# Altium PCB LCR.PcbDoc (part 2 of 2)
Units mil, origin at the board's own origin, x right, y up, seen from the top; angles counter-clockwise.
Board outline 3937.01 x 3149.61 mil, 2 copper layers (Top, Bottom); 95 components, 118 nets, 438 pads, 285 vias.
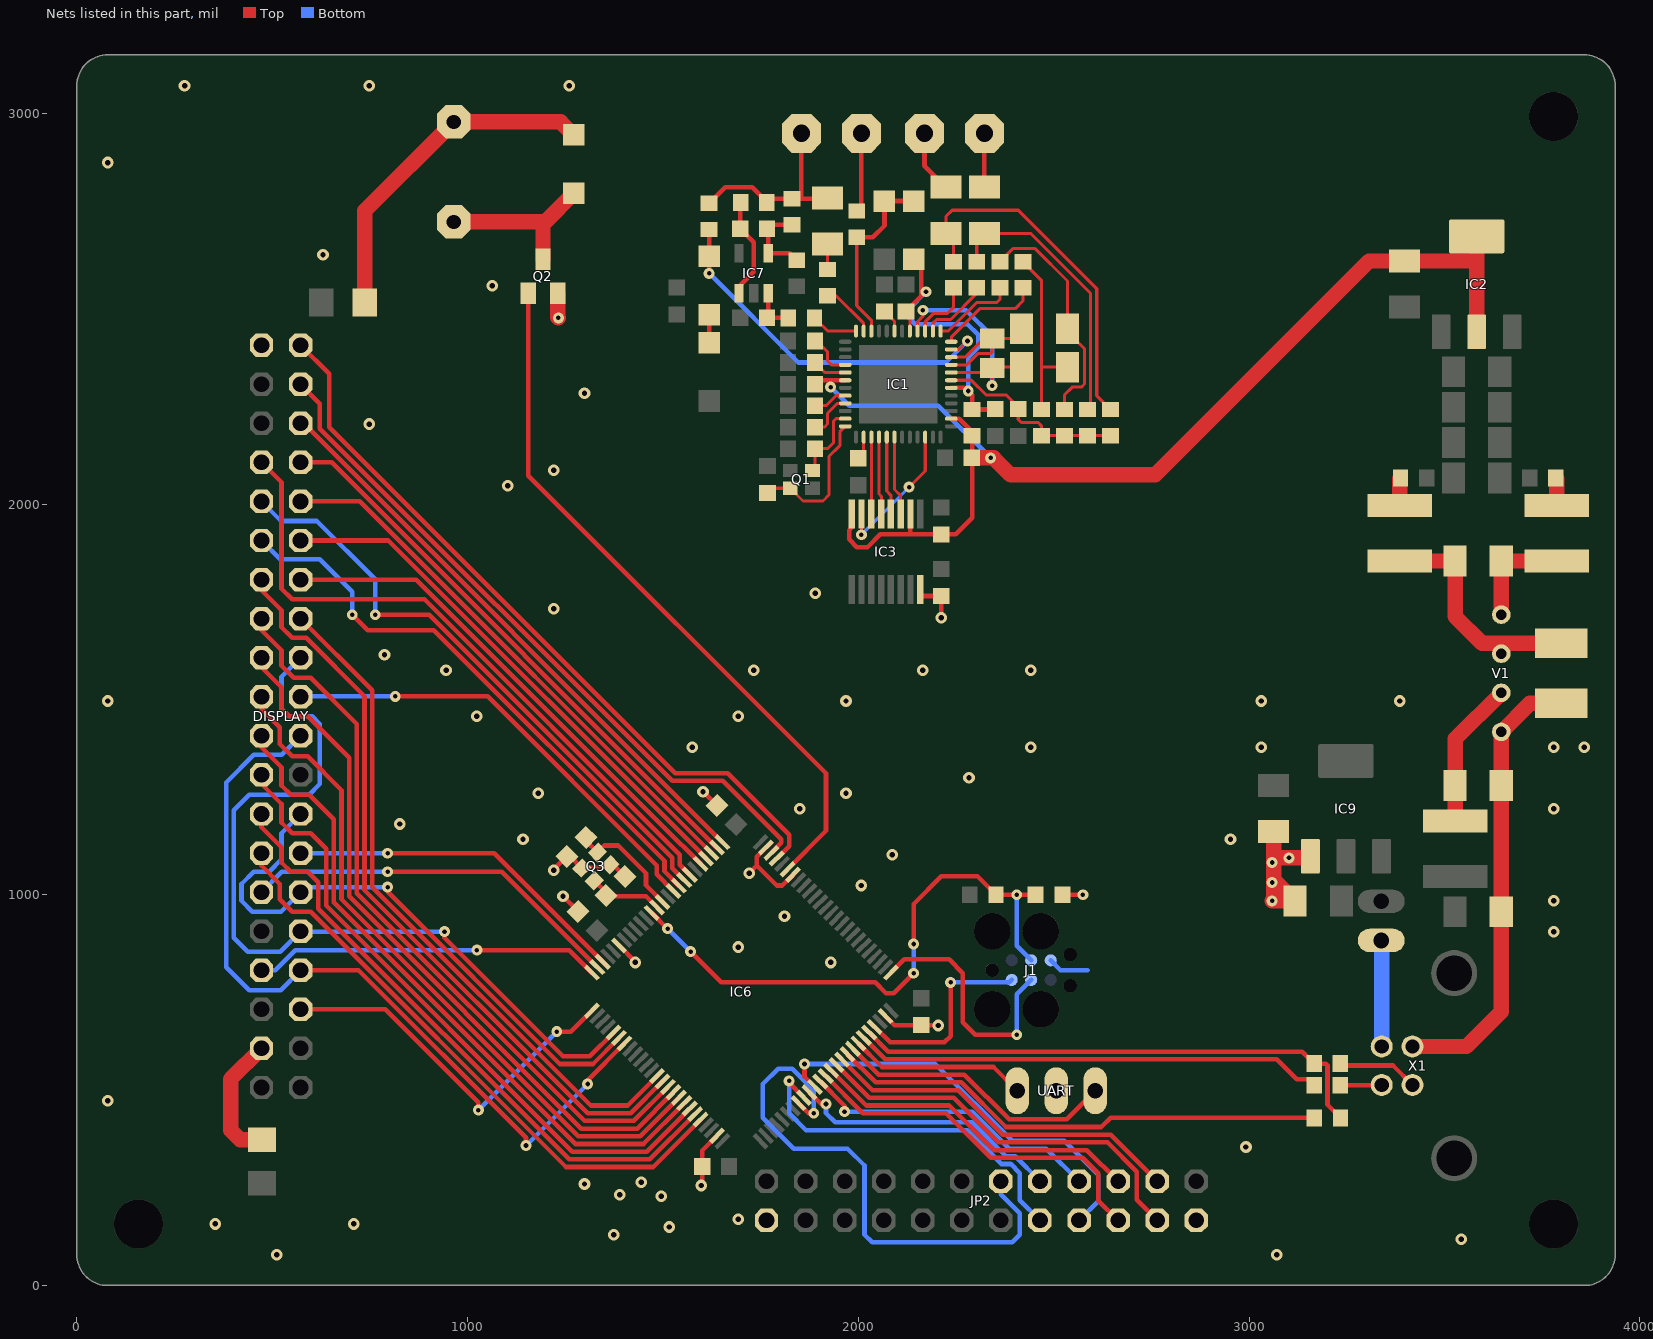
[diagram p2: the nets of this part, all layers, seen from the top]

## Via types
v1: diameter 27.81/27.81 (per signal layer), hole 11.81, Top to Bottom, 220 vias
v2: diameter 29.78/29.78 (per signal layer), hole 13.78, Top to Bottom, 65 vias

## Nets (pads, with @x,y where several pads share a name; then routed paths per layer and width w, separated by ;. In a path a pad name is that pad's centre, name@x,y a point inside that pad or via, vN(x,y) a via of type N, cw(c..) or ccw(c..) an arc to the next point about the centre after c; other vN are vias at no path point) (continued)
EXT_14: IC6.58 JP2.14 | length 1422.4
  Top w11.81: IC6.58@1846.94,466.62 1872.62,440.94 v1(1885.83,440.94)
  Bottom w11.81: v1(1885.83,440.94) 1885.83,500 1830.71,555.12 1795.28,555.12 1755.91,515.75 1755.91,429.13 1834.65,350.39 1972.44,350.39 2015.75,307.09 2015.75,129.92 2035.43,110.24 2393.7,110.24 2413.39,129.92 2413.39,185.04 2364.96,233.46 JP2.14@2364.96,266.54
EXT_15: IC6.59 JP2.15 | length 937.9
  Top w11.81: v1(1822.83,523.62) 1822.83,518.57 IC6.59@1860.86,480.54
  Bottom w11.81: v1(1822.83,523.62) 1822.83,440.94 1866.14,397.64 2279.53,397.64 2366.14,311.02 2389.76,311.02 2413.39,287.4 2413.39,218.11 JP2.15@2464.96,166.54
EXT_16: IC6.60 JP2.16 | length 698.9
  Top w11.81: IC6.60@1874.78,494.46 1904.67,464.57 v1(1917.32,464.57)
  Bottom w11.81: v1(1917.32,464.57) 1917.32,440.94 1940.94,417.32 2291.34,417.32 2377.95,330.71 2401.57,330.71 2464.96,267.32 JP2.16@2464.96,266.54
EXT_17: IC6.61 JP2.17 | length 1076.2
  Top w11.81: v1(1862.2,566.93) 1862.2,534.87 IC6.61@1888.7,508.38
  Bottom w11.81: v1(1862.2,566.93) 2196.85,566.93 2393.7,370.08 2527.56,370.08 2614.17,283.46 2614.17,215.75 JP2.17@2564.96,166.54
EXT_18: IC6.62 JP2.18 | length 777.3
  Top w11.81: IC6.62@1902.62,522.29 1964.57,460.35 v1(1964.57,444.88)
  Bottom w11.81: v1(1964.57,444.88) 2291.34,444.88 2385.83,350.39 2481.1,350.39 JP2.18@2564.96,266.54
EXT_19: IC6.63 JP2.19 | length 942.6
  Top w11.81: IC6.63@1916.54,536.22 2011.81,440.94 2224.41,440.94 2338.58,326.77 2574.8,326.77 2614.17,287.4 2614.17,217.32 JP2.19@2664.96,166.54
EXT_20: IC6.64 JP2.20 | length 852
  Top w11.81: IC6.64@1930.47,550.14 2019.96,460.63 2232.28,460.63 2346.46,346.46 2585.04,346.46 JP2.20@2664.96,266.54
EXT_21: IC6.65 JP2.21 | length 1027.7
  Top w11.81: IC6.65@1944.38,564.06 2028.12,480.32 2244.09,480.32 2358.27,366.14 2637.8,366.14 2712.6,291.34 2712.6,218.9 JP2.21@2764.96,166.54
EXT_22: IC6.66 JP2.22 | length 935.7
  Top w11.81: IC6.66@1958.3,577.98 2036.27,500 2255.91,500 2370.08,385.83 2645.67,385.83 JP2.22@2764.96,266.54
GND: C2.2 C3.2 C4.2 C14.2 C15.2 C21.1 C22.1 C23.1 C24.1 C25.2 C28.2 C32.2 C33.2 DISPLAY.1 IC3.8 IC6.20 IC6.49 IC6.74 IC6.94 IC6.99 IC9.1 J1.5 JP2.1 JP2.23 Q2.2 Q3.2 Q3.4 UART.2 V1.1 X1.4 | length 2815.2
  Top w7.87: Q3.2@1292.21,1068.33 1294.76,1070.87 1358.79,1070.87 Q3.4@1364.59,1076.67
  Top w11.81: v2(1220.47,1062.99) 1220.47,1064.79 1253.93,1098.25 1262.28,1098.25 Q3.2@1292.21,1068.33 ; v2(1244.09,996.06) C23.1@1282.73,957.43 ; Q3.4@1364.59,1076.67 1372.94,1076.67 C15.2@1402.87,1046.75 ; IC6.20@1387.6,870.28 1429.13,828.75 v2(1429.13,826.77) ; v2(1598.43,255.91) 1600.59,255.91 C22.1@1600.59,304.43 1600.59,345.54 IC6.49@1638.15,383.1 ; v2(1602.36,1263.78) 1603.32,1263.78 C24.1@1638.69,1228.41 ; v2(1720.47,1055.12) 1740.16,1074.8 ; IC6.99@1763.43,1120.84 1740.16,1097.57 1740.16,1074.8 ; IC6.94@1833.03,1051.24 1805.41,1023.62 1791.34,1023.62 1740.16,1074.8 ; IC6.74@2069.65,689.33 2092.64,666.34 C21.1@2161.42,666.34 2204.72,666.34 v2(2204.72,665.35) ; IC3.8@2158.37,1781.28 2158.37,1764.76 C28.2@2212.6,1764.76 v2(2212.6,1708.66) ; C25.2@2522.64,1000 v1(2574.8,1000)
  Top w39.37: Q2.2@1230.31,2539.37 1230.32,2478.35 v1(1232.28,2476.38) ; C32.2@3062.99,1161.41 v1@3062.99,1094.49 ; IC9.1@3157.05,1098.46 3153.07,1094.49 v1@3062.99,1094.49 ; X1.4@3418.31,611.71 3556.59,611.71 3645.67,700.79 C4.2@3645.67,956.69 C3.2@3645.67,1279.53 V1.1@3645.67,1416.93 3718.9,1490.16 C2.2@3799.21,1490.16 ; v1@3062.99,1039.37 3062.99,988.19 v1(3059.06,984.25) C33.2@3118.11,984.25 v1@3062.99,1039.37 ; v1@3062.99,1039.37 v1@3062.99,1094.49
  Bottom w11.81: J1.5@2492.52,832.09 2517.52,807.09 2586.61,807.09
  other v1: 3059.06,1031.5 3059.06,1082.68 3102.36,1094.49
  other v2: 511.81,78.74 3070.87,78.74 3543.31,118.11 1374.02,129.92 1515.75,149.61 354.33,157.48 708.66,157.48 1692.91,169.29 1496.06,228.35 1389.76,232.28 1299.21,259.84 1444.88,263.78 2992.13,354.33 78.74,472.44 1929.13,826.77 1692.91,866.14 3779.53,905.51 1811.02,944.88 3779.53,984.25 2007.87,1023.62 2086.61,1102.36 1141.73,1141.73 2952.76,1141.73 826.77,1181.1 1850.39,1220.47 3779.53,1220.47 1181.1,1259.84 1968.5,1259.84 2283.46,1299.21 1574.8,1377.95 2440.94,1377.95 3031.5,1377.95 3779.53,1377.95 3858.27,1377.95 1023.62,1456.69 1692.91,1456.69 78.74,1496.06 1968.5,1496.06 3031.5,1496.06 3385.83,1496.06 944.88,1574.8 1732.28,1574.8 2165.35,1574.8 2440.94,1574.8 787.4,1614.17 1220.47,1732.28 1889.76,1771.65 1102.36,2047.24 1220.47,2086.61 748.03,2204.72 1299.21,2283.46 1062.99,2559.06 629.92,2637.8 78.74,2874.02 275.59,3070.87 748.03,3070.87 1259.84,3070.87
I+: C42.2 I+.1 R4.1 R15.1 R17.1 | length 512.6
  Top w11.81: R4.1@1618.11,2769.68 1659.45,2811.02 1728.35,2811.02 R17.1@1766.73,2772.64 ; R17.1@1765.75,2771.65 R17.1@1766.73,2772.64 ; I+.1@1854.33,2948.82 1854.33,2789.37 R15.1@1846.46,2781.5 ; C42.2@1921.26,2783.47 1919.29,2781.5 R15.1@1846.46,2781.5 ; R17.1@1766.73,2772.64 1775.59,2781.5 R15.1@1830.71,2781.49 R15.1@1846.46,2781.5
I-: I-.1 R3.1 | length 203.7
  Top w7.87: R3.1@1996.06,2750 R3.1@2007.87,2761.81
  Top w11.81: R3.1@2007.87,2761.81 I-.1@2007.87,2948.82
N$1: C1.1 IC1.31 R1.2 R2.2 R12.2 R13.2 | length 499.8
  Top w7.87: IC1.31@2238.01,2316.93 2289.37,2316.93 2326.77,2279.53 2377.95,2279.53 2409.45,2248.03 C1.1@2409.45,2243.11 2409.45,2216.54 2417.32,2208.66 2460.63,2208.66 2468.5,2200.79 R1.2@2468.5,2175.2 R2.2@2527.56,2175.2 R12.2@2586.61,2175.2 R13.2@2645.67,2175.2
N$2: C6.1 IC1.4 | length 117
  Top w7.87: C6.1@1888.78,2417.32 1893.7,2417.32 1921.26,2389.76 1921.26,2366.14 1931.1,2356.3 IC1.4@1966.71,2356.3
N$3: C5.1 IC1.43 | length 61
  Top w7.87: C5.1@2066.93,2493.11 2092.52,2467.52 IC1.43@2092.52,2442.74
N$4: C9.1 IC1.5 | length 88.5
  Top w7.87: C9.1@1888.78,2362.2 1914.37,2336.61 IC1.5@1966.71,2336.62
N$5: C10.1 IC1.14 | length 60
  Top w7.87: C10.1@2000,2117.13 2013.78,2130.91 IC1.14@2013.78,2171.44
N$6: C11.1 IC1.8 | length 88.5
  Top w7.87: C11.1@1888.78,2251.97 1917.32,2251.97 1942.91,2277.56 IC1.8@1966.71,2277.56
N$7: C12.1 IC1.9 | length 119.3
  Top w7.87: C12.1@1888.78,2196.85 1913.39,2196.85 1921.26,2204.72 1921.26,2232.28 1946.85,2257.87 IC1.9@1966.71,2257.88
N$8: C16.1 IC1.12 Q1.3 | length 374.7
  Top w7.87: C16.1@1767.72,2028.54 1779.53,2040.35 Q1.3@1825.79,2040.35 1858.27,2007.87 1909.45,2007.87 1925.2,2023.62 1925.2,2122.05 1952.76,2149.61 1952.76,2184.87 IC1.12@1966.71,2198.82
N$9: C13.1 IC1.11 Q1.1 | length 200.6
  Top w7.87: Q1.1@1882.87,2085.63 1888.78,2091.54 C13.1@1888.78,2141.73 1921.26,2141.73 1937.01,2157.48 1937.01,2212.6 1942.91,2218.5 IC1.11@1966.71,2218.51
N$10: IC1.17 IC3.12 | length 201.2
  Top w7.87: IC1.17@2072.83,2171.44 2072.83,2033.46 2083.37,2022.93 IC3.12@2083.37,1974.62
N$11: C42.1 R18.1 | length 65
  Top w7.87: R18.1@1921.26,2600.39 C42.1@1921.26,2665.35
N$12: IC1.22 IC3.15 | length 371.4
  Top w7.87: v1(2007.87,1921.26) 2008.37,1921.75 IC3.15@2008.37,1974.62 ; v1(2129.92,2043.31) 2171.26,2084.65 IC1.22@2171.26,2171.44
  Bottom w7.87: v1(2007.87,1921.26) v1(2129.92,2043.31)
N$13: IC1.15 IC3.14 | length 196.8
  Top w7.87: IC3.14@2033.37,1974.62 2033.46,1974.72 IC1.15@2033.46,2171.44
N$14: IC1.16 IC3.13 | length 199.5
  Top w7.87: IC1.16@2053.15,2171.44 2053.15,2025.59 2059.06,2019.69 2059.06,1975.31 IC3.13@2058.37,1974.62
N$15: IC1.18 IC3.11 | length 203.4
  Top w7.87: IC1.18@2092.52,2171.44 2092.52,2037.4 2108.37,2021.56 IC3.11@2108.37,1974.62
N$16: C38.1 C39.1 D2.C IC1.30 IC1.41 L9.2 | length 815.4
  Top w7.87: C38.1@2122.05,2493.11 2131.89,2483.27 IC1.41@2131.89,2442.74
  Top w11.81: C38.1@2122.05,2493.11 2161.42,2532.48 v1@2161.42,2543.31 ; D2.C@2141.73,2625.99 2161.42,2606.3 v1@2161.42,2543.31 ; v1(2173.23,2543.31) v1@2161.42,2543.31 ; IC1.30@2238.01,2297.25 2273.62,2297.24 v1(2281.5,2289.37) 2291.34,2279.53 L9.2@2291.34,2242.12 2349.41,2242.13 C39.1@2350.39,2243.11
  Bottom w11.81: v1(2173.23,2543.31) 2129.92,2500 2129.92,2476.38 2145.67,2460.63 2279.53,2460.63 2307.09,2433.07 2307.09,2401.57 2281.5,2375.98 v1(2281.5,2289.37)
N$17: IC1.47 R18.2 | length 141.7
  Top w7.87: R18.2@1921.26,2533.47 1942.91,2533.46 2013.78,2462.6 IC1.47@2013.78,2442.74
N$18: IC1.39 R7.1 | length 161.3
  Top w7.87: IC1.39@2171.26,2442.74 2171.26,2466.2 2176.73,2471.67 2176.73,2472 2192.91,2488.19 2228.35,2488.19 2244.09,2503.94 R7.1@2244.09,2553.15
N$19: IC1.38 R8.1 | length 177.6
  Top w7.87: IC1.38@2190.94,2442.74 2190.94,2462.6 2200.79,2472.44 2236.22,2472.44 2303.15,2539.37 R8.1@2303.15,2553.15
N$20: C3.1 L1.P$2 V1.2 | length 376.9
  Top w39.37: L1.P$2@3527.56,1188.98 C3.1@3527.55,1279.53 3527.56,1398.82 V1.2@3645.67,1516.93
N$21: C44.1 R8.2 R12.1 | length 716.7
  Top w7.87: R8.2@2303.15,2620.07 2303.15,2673.23 C44.1@2322.83,2692.91 2440.94,2692.91 2594.49,2539.37 2594.49,2250 R12.1@2586.61,2242.12
N$23: C43.1 R7.2 R13.1 | length 923.5
  Top w7.87: R7.2@2244.09,2620.07 2244.09,2673.23 C43.1@2224.41,2692.91 2224.41,2736.22 2240.16,2751.97 2409.45,2751.97 2610.24,2551.18 2610.24,2277.56 R13.1@2645.67,2242.12
N$24: C49.2 IC1.33 IC1.34 R9.1 | length 358.8
  Top w7.87: IC1.33@2238.01,2356.3 2277.56,2356.3 2307.09,2385.83 2338.58,2385.83 2342.52,2389.76 R9.1@2342.52,2417.32 ; IC1.34@2238.01,2375.99 2273.62,2375.98 2314.96,2417.32 R9.1@2342.52,2417.32 ; C49.2@2417.32,2448.82 2391.73,2423.23 R9.1@2342.52,2423.23 R9.1@2342.52,2417.32
N$25: C7.1 L2.P$1 V1.4 | length 279.1
  Top w39.37: V1.4@3645.67,1716.93 C7.1@3645.67,1854.33 L2.P$1@3787.4,1854.33
N$26: C2.1 C7.2 L4.P$1 V1.3 | length 610.4
  Top w39.37: L4.P$1@3385.83,1854.33 C7.2@3527.55,1854.33 3527.56,1712.6 3596.46,1643.7 3645.67,1643.7 ; V1.3@3645.67,1616.93 3645.67,1643.7 ; C2.1@3799.21,1643.7 3645.67,1643.7
N$27: IC1.37 R10.1 | length 214.6
  Top w7.87: IC1.37@2210.63,2442.74 2230.14,2442.74 2303.15,2515.75 2354.33,2515.75 2362.2,2523.62 R10.1@2362.2,2553.15
N$28: IC1.36 R11.1 | length 266.7
  Top w7.87: IC1.36@2238.01,2415.36 2238.02,2426.99 2311.02,2500 2401.57,2500 2421.26,2519.69 R11.1@2421.26,2553.15
N$29: C50.1 R1.1 R11.2 | length 464.4
  Top w7.87: R11.2@2421.26,2620.07 2468.5,2572.83 2468.5,2350.39 ; R1.1@2468.5,2242.12 2468.5,2350.39 ; C50.1@2535.44,2350.39 2468.5,2350.39
N$30: C49.1 R2.1 R10.2 | length 603.1
  Top w7.87: R10.2@2362.2,2620.07 2395.67,2653.54 2452.76,2653.54 2535.43,2570.87 C49.1@2535.44,2448.82 2535.43,2440.94 2578.74,2397.64 2578.74,2307.09 2570.87,2299.21 2547.24,2299.21 2527.56,2279.53 R2.1@2527.56,2242.12
N$31: IC1.48 R16.2 | length 120.2
  Top w7.87: R16.2@1887.79,2476.38 1921.43,2442.74 IC1.48@1994.09,2442.74
N$32: C52.2 IC7.3 R16.1 | length 118.1
  Top w11.81: IC7.3@1769.68,2539.13 1769.69,2479.33 C52.2@1766.73,2476.38 R16.1@1820.87,2476.38
N$33: C51.1 IC7.4 R14.2 R15.2 | length 212.3
  Top w11.81: R15.2@1830.71,2714.57 1776.57,2714.57 C51.1@1766.73,2704.72 1769.69,2701.77 IC7.4@1769.68,2641.97 1824.57,2641.97 R14.2@1842.52,2624.01
N$34: C51.2 IC7.1 R17.2 | length 262.7
  Top w11.81: IC7.1@1694.88,2539.13 1694.88,2557.09 1732.28,2594.49 1732.28,2670.28 C51.2@1697.83,2704.72 1697.83,2770.67 R17.2@1698.82,2771.65
N$35: D1.C D2.A IC1.46 R3.2 | length 476.7
  Top w7.87: R3.2@1996.06,2683.08 1996.06,2507.87 2033.46,2470.47 IC1.46@2033.46,2442.74
  Top w11.81: R3.2@1996.06,2683.08 2037.4,2683.07 2066.93,2712.6 D1.C@2066.93,2775.59 D2.A@2141.73,2775.59
N$36: L2.P$2 L3.1 | length 71.7
  Top w39.37: L3.1@3785.43,2066.93 3787.4,2064.96 L2.P$2@3787.4,1996.07
N$37: D4.A IC1.35 R4.2 | length 941.5
  Top w7.87: IC1.35@2238.01,2395.67 2257.87,2395.67 v1(2279.53,2417.32)
  Top w11.81: v1(1618.11,2590.55) D4.A@1618.11,2633.86 R4.2@1618.11,2702.76
  Bottom w11.81: v1(1618.11,2590.55) 1846.46,2362.2 2224.41,2362.2 v1(2279.53,2417.32)
N$38: IC6.95 Q2.1 | length 1830.4
  Top w11.81: Q2.1@1155.51,2539.37 1155.51,2072.83 1917.32,1311.02 1917.32,1163.38 IC6.95@1819.1,1065.16
N$39: D3.A D4.C | length 70.9
  Top w11.81: D3.A@1618.11,2413.38 D4.C@1618.11,2484.25
N$41: DISPLAY.2 IC6.97 | length 1923.1
  Top w11.81: DISPLAY.2@572.44,2406.69 645.67,2333.46 645.67,2196.85 1531.5,1311.02 1665.35,1311.02 1822.83,1153.54 1822.83,1124.57 IC6.97@1791.26,1093
N$43: DISPLAY.4 IC6.98 | length 1796.4
  Top w11.81: DISPLAY.4@572.44,2306.69 622.05,2257.09 622.05,2192.91 1523.62,1291.34 1653.54,1291.34 1803.15,1141.73 1803.15,1132.72 IC6.98@1777.35,1106.92
N$44: DISPLAY.6 IC6.1 | length 1523.6
  Top w11.81: DISPLAY.6@572.44,2206.69 580.13,2206.69 IC6.1@1652.07,1134.76
N$45: DISPLAY.8 IC6.2 | length 1474.1
  Top w11.81: DISPLAY.8@572.44,2106.69 652.29,2106.69 IC6.2@1638.15,1120.84
N$46: DISPLAY.22 DISPLAY.34 IC6.32 | length 2088.7
  Top w11.81: DISPLAY.34@572.44,806.69 720.87,806.69 1149.61,377.95 v1(1149.61,358.27) ; v1(1307.09,515.75) 1307.09,525.3 IC6.32@1401.52,619.73
  Bottom w11.81: DISPLAY.34@572.44,806.69 521.65,755.91 440.94,755.91 381.89,814.96 381.89,1287.4 452.76,1358.27 524.02,1358.27 DISPLAY.22@572.44,1406.69 ; v1(1149.61,358.27) v1(1307.09,515.75)
N$47: DISPLAY.10 IC6.3 | length 1424.5
  Top w11.81: DISPLAY.10@572.44,2006.69 724.45,2006.69 IC6.3@1624.23,1106.92
N$48: DISPLAY.12 IC6.4 | length 1374.9
  Top w11.81: DISPLAY.12@572.44,1906.69 796.61,1906.69 IC6.4@1610.32,1093
N$49: DISPLAY.14 IC6.5 | length 1325.3
  Top w11.81: DISPLAY.14@572.44,1806.69 868.77,1806.69 1501.12,1174.35 IC6.5@1596.39,1079.08
N$50: DISPLAY.16 IC6.38 | length 1755
  Top w11.81: DISPLAY.16@572.44,1706.69 755.91,1523.23 755.91,1019.69 1314.96,460.63 1409.45,460.63 IC6.38@1485.04,536.22
N$51: DISPLAY.26 DISPLAY.30 IC6.31 | length 1534.1
  Top w11.81: v1(795.28,1019.69) 795.28,1007.87 1236.22,566.93 1320.88,566.93 IC6.31@1387.6,633.65
  Bottom w11.81: DISPLAY.26@572.44,1206.69 523.62,1157.87 523.62,1090.55 492.13,1059.06 452.76,1059.06 421.26,1027.56 421.26,984.25 448.82,956.69 522.44,956.69 DISPLAY.30@572.44,1006.69 585.43,1019.69 v1(795.28,1019.69)
N$52: DISPLAY.18 DISPLAY.32 IC6.30 | length 2169.3
  Top w11.81: v1(940.94,905.51) 940.94,889.76 1244.09,586.61 1312.72,586.61 IC6.30@1373.68,647.57
  Bottom w11.81: DISPLAY.18@572.44,1606.69 523.62,1557.87 523.62,1476.38 543.31,1456.69 602.36,1456.69 622.05,1437.01 622.05,1283.46 594.49,1255.91 440.94,1255.91 401.57,1216.54 401.57,889.76 437.01,854.33 520.08,854.33 DISPLAY.32@572.44,906.69 573.62,905.51 v1(940.94,905.51)
N$53: C14.1 IC6.12 Q3.1 | length 302.3
  Top w11.81: C14.1@1302.65,1146.97 1302.65,1138.61 Q3.1@1332.57,1108.69 1349.88,1125.98 1385.83,1125.98 1456.69,1055.12 1456.69,1023.9 IC6.12@1498.96,981.65
N$54: C15.1 IC6.13 Q3.3 | length 194.1
  Top w11.81: Q3.3@1324.23,1036.31 1354.15,1006.38 C15.1@1354.15,998.03 1356.12,996.06 1456.69,996.06 IC6.13@1485.04,967.72
N$55: R21.2 X1.2 | length 106.4
  Top w11.81: R21.2@3233.46,512.5 3338.78,512.5 X1.2@3339.57,513.29
N$56: R22.2 X1.3 | length 207.4
  Top w11.81: R22.2@3233.46,567.82 3238.29,562.99 3368.6,562.99 X1.3@3418.31,513.29
N$58: L4.P$2 L5.1 | length 71.7
  Top w39.37: L4.P$2@3385.83,1996.07 3385.83,2064.96 L5.1@3387.8,2066.93
N$59: C50.2 IC1.32 IC1.40 R9.2 | length 627.2
  Top w7.87: IC1.40@2151.57,2442.74 2151.57,2466.54 2165.35,2480.32 v1(2165.35,2496.06) ; IC1.32@2238.01,2336.62 2330.71,2336.61 R9.2@2337.6,2343.5 ; v1(2342.52,2303.15) R9.2@2342.52,2348.43 R9.2@2337.6,2343.5 ; C50.2@2417.32,2350.39 2344.49,2350.39 R9.2@2337.6,2343.5
  Bottom w11.81: v1(2165.35,2496.06) 2275.59,2496.06 2342.52,2429.13 v1(2342.52,2303.15)
N$60: C25.1 IC6.14 J1.3 R29.2 | length 1498.4
  Top w11.81: IC6.14@1471.11,953.8 1511.53,913.39 v1(1511.81,913.39) ; v1(1570.87,854.33) 1649.61,775.59 2043.31,775.59 2070.87,748.03 2090.55,748.03 v1(2141.73,799.21) ; v1(2141.73,874.02) 2141.73,976.38 2212.6,1047.24 2305.12,1047.24 R29.2@2352.36,1000 v1(2405.51,1000) C25.1@2453.74,1000
  Bottom w11.81: v1(1511.81,913.39) v1(1570.87,854.33) ; v1(2141.73,799.21) v1(2141.73,874.02) ; v1(2405.51,1000) 2405.51,869.09 J1.3@2442.52,832.09
N$61: DISPLAY.37 R30.1 | length 331.8
  Top w39.37: DISPLAY.37@472.44,606.69 393.7,527.95 393.7,397.64 417.93,373.41 R30.1@473.82,373.4
N$62: DISPLAY.13 IC6.39 | length 1957.8
  Top w11.81: DISPLAY.13@472.44,1806.69 472.44,1779.53 523.62,1728.35 523.62,1685.04 551.18,1657.48 586.61,1657.48 736.22,1507.87 736.22,1011.81 1307.09,440.94 1417.6,440.94 IC6.39@1498.96,522.29
N$63: DISPLAY.15 IC6.40 | length 1903
  Top w11.81: DISPLAY.15@472.44,1706.69 472.44,1677.17 523.62,1625.98 523.62,1586.61 555.12,1555.12 598.43,1555.12 716.54,1437.01 716.54,1003.94 1299.21,421.26 1425.76,421.26 IC6.40@1512.88,508.38
N$64: DISPLAY.17 IC6.41 | length 1845.9
  Top w11.81: DISPLAY.17@472.44,1606.69 472.44,1582.68 523.62,1531.5 523.62,1476.38 543.31,1456.69 590.55,1456.69 696.85,1350.39 696.85,996.06 1291.34,401.57 1433.91,401.57 IC6.41@1526.8,494.46
N$65: DISPLAY.19 IC6.42 | length 1781.9
  Top w11.81: DISPLAY.19@472.44,1506.69 472.44,1476.38 519.68,1429.13 519.68,1385.83 551.18,1354.33 590.55,1354.33 677.17,1267.72 677.17,988.19 1283.46,381.89 1442.06,381.89 IC6.42@1540.72,480.54
N$66: JP1.2 X1.1 | length 271.8
  Bottom w39.37: JP1.2@3338.58,883.07 3339.57,882.09 X1.1@3339.57,611.71
N$67: D5.C R6.1 SG1.+ | length 877.8
  Top w39.37: R6.1@737.08,2515.75 737.09,2750.91 SG1.+@964.57,2978.39 1238.14,2978.39 D5.C@1271.65,2944.88
N$68: DISPLAY.21 IC6.43 | length 1727.1
  Top w11.81: DISPLAY.21@472.44,1406.69 472.44,1377.95 523.62,1326.77 523.62,1279.53 547.24,1255.91 594.49,1255.91 657.48,1192.91 657.48,980.32 1275.59,362.2 1450.22,362.2 IC6.43@1554.64,466.62
N$69: DISPLAY.23 IC6.44 | length 1667.7
  Top w11.81: DISPLAY.23@472.44,1306.69 472.44,1283.46 523.62,1232.28 523.62,1185.04 551.18,1157.48 598.43,1157.48 637.8,1118.11 637.8,972.44 1267.72,342.52 1458.37,342.52 IC6.44@1568.55,452.7
N$70: DISPLAY.25 IC6.45 | length 1606
  Top w11.81: DISPLAY.25@472.44,1206.69 472.44,1173.23 523.62,1122.05 523.62,1082.68 547.24,1059.06 590.55,1059.06 618.11,1031.5 618.11,964.57 1259.84,322.83 1466.53,322.83 IC6.45@1582.48,438.78
N$71: DISPLAY.27 IC6.46 | length 1548.9
  Top w11.81: DISPLAY.27@472.44,1106.69 472.44,1074.8 519.68,1027.56 519.68,988.19 551.18,956.69 598.43,956.69 1251.97,303.15 1474.68,303.15 IC6.46@1596.39,424.86
N$72: D5.A Q2.3 SG1.- | length 436.1
  Top w39.37: SG1.-@964.57,2722.39 1198.77,2722.39 ; Q2.3@1192.91,2625.99 1192.91,2716.54 1198.77,2722.39 ; D5.A@1271.65,2795.28 1198.77,2722.39
RX: IC6.69 UART.1 | length 456.8
  Top w11.81: IC6.69@2000.06,619.73 2060.73,559.06 2345.96,559.06 UART.1@2406.59,498.43
SD_CS: DISPLAY.36 IC6.26 | length 969.3
  Top w11.81: DISPLAY.36@572.44,706.69 789.37,706.69 1027.56,468.5 v1(1027.56,448.82) ; v1(1228.35,649.61) 1264.36,649.61 IC6.26@1318,703.25
  Bottom w11.81: v1(1027.56,448.82) v1(1228.35,649.61)
SWCLK: IC6.76 J1.4 | length 645.4
  Top w11.81: IC6.76@2083.58,800.69 2117.53,834.65 2232.28,834.65 2267.72,799.21 2267.72,673.23 2299.21,641.73 v1(2405.51,641.73)
  Bottom w11.81: v1(2405.51,641.73) 2405.51,745.08 J1.4@2442.52,782.09
SWDIO: IC6.72 J1.2 | length 514
  Top w11.81: IC6.72@2041.82,661.5 2081.26,622.05 2220.47,622.05 2236.22,637.8 v1(2236.22,775.59)
  Bottom w11.81: v1(2236.22,775.59) 2386.02,775.59 J1.2@2392.52,782.09
TFT_CS: DISPLAY.29 IC6.24 | length 982.4
  Top w11.81: v1(795.28,1059.06) 1087.47,1059.06 IC6.24@1331.92,814.61
  Bottom w11.81: DISPLAY.29@472.44,1006.69 524.8,1059.06 v1(795.28,1059.06)
TFT_RD: DISPLAY.11 IC6.9 | length 1484.2
  Top w11.81: v1(704.72,1716.54) 744.09,1677.17 913.39,1677.17 1503.94,1086.61 1503.94,1060.17 IC6.9@1540.72,1023.4
  Bottom w11.81: DISPLAY.11@472.44,1906.69 520.87,1858.27 622.05,1858.27 704.72,1775.59 v1(704.72,1716.54)
TFT_RS: DISPLAY.7 IC6.7 | length 1707.8
  Top w11.81: DISPLAY.7@472.44,2106.69 523.62,2055.51 523.62,1783.46 551.18,1755.91 889.76,1755.91 1543.31,1102.36 1543.31,1076.48 IC6.7@1568.55,1051.24
TFT_RST: DISPLAY.33 IC6.25 | length 890.8
  Top w11.81: v1(1023.62,858.27) 1260.42,858.27 IC6.25@1318,800.69
  Bottom w11.81: DISPLAY.33@472.44,806.69 507.48,806.69 559.06,858.27 v1(1023.62,858.27)
TFT_WR: DISPLAY.9 IC6.8 | length 1552.1
  Top w11.81: v1(763.78,1716.54) 901.57,1716.54 1523.62,1094.49 1523.62,1068.33 IC6.8@1554.64,1037.32
  Bottom w11.81: DISPLAY.9@472.44,2006.69 522.44,1956.69 614.17,1956.69 763.78,1807.09 v1(763.78,1716.54)
TOUCH_CS: DISPLAY.20 IC6.10 | length 1174.6
  Top w11.81: v1(814.96,1507.87) 1051.18,1507.87 1484.25,1074.8 1484.25,1052.02 IC6.10@1526.8,1009.48
  Bottom w11.81: DISPLAY.20@572.44,1506.69 573.62,1507.87 v1(814.96,1507.87)
TOUCH_IRQ: DISPLAY.28 IC6.23 | length 888.6
  Top w11.81: v1(795.28,1106.3) 1068.07,1106.3 IC6.23@1345.84,828.53
  Bottom w11.81: DISPLAY.28@572.44,1106.69 794.88,1106.69 v1(795.28,1106.3)
TX: IC6.68 UART.3 | length 725.6
  Top w11.81: IC6.68@1986.14,605.82 2052.58,539.37 2271.65,539.37 2385.83,425.2 2533.37,425.2 UART.3@2606.59,498.43
U+: C43.2 U+.1 | length 160.6
  Top w11.81: U+.1@2169.29,2948.82 2169.29,2866.14 C43.2@2224.41,2811.03
U-: C44.2 U-.1 | length 137.8
  Top w11.81: C44.2@2322.83,2811.03 U-.1@2322.83,2948.82
USB_IDENT: IC6.67 R5.2 | length 1282.1
  Top w11.81: IC6.67@1972.22,591.9 2044.43,519.68 2263.78,519.68 2377.95,405.51 2622.05,405.51 2645.67,429.13 R5.2@3167.33,429.13
USB_N: IC6.70 R21.1 | length 1202.7
  Top w11.81: IC6.70@2013.97,633.65 2068.89,578.74 3070.87,578.74 3122.05,527.56 3151.48,527.56 R21.1@3166.54,512.5
USB_P: IC6.71 R5.1 R22.1 | length 1355.6
  Top w11.81: IC6.71@2027.9,647.57 2077.04,598.43 3135.93,598.43 R22.1@3166.54,567.82 3195.96,567.82 3200.79,562.99 3200.79,462.6 R5.1@3234.25,429.13
VCC: C17.1 C18.1 C27.1 C34.1 IC1.6 IC1.26 IC2.2 IC2.4 IC3.10 IC3.16 L9.1 | length 3197.9
  Top w7.87: C34.1@1888.78,2307.09 1893.21,2311.52 C34.1@1898.62,2316.93 ; C18.1@2290.36,2118.11 C18.1@2291.34,2119.09 ; L9.1@2291.34,2175.2 L9.1@2291.34,2185.04
  Top w11.81: C34.1@1893.21,2311.52 1898.62,2316.93 1929.13,2316.93 ; v1(1929.13,2299.21) 1929.13,2316.93 ; IC1.6@1966.71,2316.93 1929.13,2316.93 ; IC3.16@1983.37,1974.62 1983.37,1940.06 1976.38,1933.07 1976.38,1909.45 1996.06,1889.76 2023.62,1889.76 2056.1,1922.24 2133.86,1922.24 ; IC3.10@2133.37,1974.62 2133.37,1922.74 2133.86,1922.24 ; IC1.26@2238.01,2218.51 2257.87,2218.5 2291.34,2185.04 L9.1@2291.34,2175.2 2291.34,2119.09 2291.34,1964.57 2249.02,1922.24 C27.1@2212.6,1922.24 2133.86,1922.24 ; C18.1@2290.36,2118.11 v1(2338.58,2118.11)
  Top w39.37: C18.1@2290.36,2118.11 2346.46,2118.11 2389.76,2074.8 2759.84,2074.8 3307.09,2622.05 C17.1@3397.64,2622.05 3574.8,2622.05 3582.68,2629.92 ; IC2.2@3582.68,2440.98 3582.68,2629.92 ; IC2.4@3582.68,2685 3582.68,2629.92
  Bottom w11.81: v1(1929.13,2299.21) 1976.38,2251.97 2204.72,2251.97 v1(2338.58,2118.11)
pads on no net: DISPLAY.5 DISPLAY.24 DISPLAY.31 DISPLAY.35 DISPLAY.38 DISPLAY.39 DISPLAY.40 IC1.1 IC1.2 IC1.3 IC1.7 IC1.10 IC1.19 IC1.20 IC1.21 IC1.24 IC1.27 IC1.28 IC1.45 IC6.11 IC6.15 IC6.16 IC6.17 IC6.18 IC6.19 IC6.27 IC6.29 IC6.33 IC6.34 IC6.35 IC6.73 IC6.77 IC6.78 IC6.79 IC6.80 IC6.81 IC6.82 IC6.83 IC6.84 IC6.85 IC6.86 IC6.87 IC6.88 IC6.96 J1.6 X1.M1 X1.M2

## Polygon pours and split planes (outlines as drawn)
AGND on Bottom "Polygon_1_Net_AGND" (solid, remove dead copper, pour order 1): 3946.86,3159.45 1438.97,3159.45 1438.97,2196.71 1724.27,1911.41 2799.36,1911.41 2854.47,1966.54 3946.86,1966.54
GND on Bottom "Polygon_1_Net_GND" (solid, remove dead copper, pour order 3): 3974.41,-43.31 3974.41,1541.34 3173.23,1541.34 2533.95,1541.34 2246.54,1828.73 1679.62,1828.73 1433.31,2075.05 1336.62,2171.74 1336.62,3202.76 -454.73,3202.76 -454.73,-143.71 3974.41,-143.71
AGND on Top "Polygon_2_Net_AGND" (solid, remove dead copper, pour order 0): 3946.86,3159.45 1438.97,3159.45 1438.97,2196.71 1724.27,1911.41 2799.36,1911.41 2854.47,1966.54 3946.86,1966.54
GND on Top "Polygon_2_Net_GND" (solid, remove dead copper, pour order 2): 3974.41,-43.31 3974.41,1541.34 3173.23,1541.34 2533.95,1541.34 2246.54,1828.73 1679.62,1828.73 1433.31,2075.05 1336.62,2171.74 1336.62,3202.76 -454.73,3202.76 -454.73,-143.71 3974.41,-143.71

## Keep-outs
Top:
  circle w0: c157.48,157.48 r118.11
  circle w0: c3779.53,157.48 r118.11
  circle w0: c3779.53,2992.13 r118.11
Keep-Out Layer:
  the board outline again, w0

## Silkscreen, mask and mechanical layers (free items; w line width, h text height)
Top Overlay:
  lines w3.94: 1267.72,1996.06 1496.06,1996.06 ; 1496.06,1417.32 1496.06,1996.06 ; 1787.4,2271.65 1759.84,2271.65 1633.86,2145.67 1496.06,2007.87 1496.06,1996.06
  text "TX" at 2673.23,480.32 h34
  text "RX" at 2275.59,476.38 h34
  text "5V" at 2881.89,334.65 h34 r90
  text "C7" at 2685.04,330.71 h34 r90
  text "C9" at 2783.46,330.71 h34 r90
  text "B2" at 1881.89,326.77 h34 r90
  text "B11" at 1984.25,326.77 h34 r90
  text "B13" at 2082.68,326.77 h34 r90
  text "B15" at 2185.04,326.77 h34 r90
  text "D9" at 2283.46,326.77 h34 r90
  text "D11" at 2385.83,326.77 h34 r90
  text "D13" at 2484.25,326.77 h34 r90
  text "D15" at 2582.68,326.77 h34 r90
  text "3V3" at 1665.35,169.29 h34 r90
  text "C6" at 2685.04,51.18 h34 r90
  text "C8" at 2783.46,51.18 h34 r90
  text "B1" at 1885.83,43.31 h34 r90
  text "D8" at 2287.4,43.31 h34 r90
  text "B10" at 1984.25,11.81 h34 r90
  text "B12" at 2082.68,11.81 h34 r90
  text "B14" at 2181.1,11.81 h34 r90
  text "D10" at 2385.83,11.81 h34 r90
  text "D12" at 2488.19,11.81 h34 r90
  text "D14" at 2582.68,11.81 h34 r90
  text "GND" at 1783.46,7.87 h34 r90
  text "GND" at 2885.83,7.87 h34 r90
Bottom Overlay:
  text "I+" at 1811.02,2716.54 h73.1 r270
  text "I-" at 1968.5,2716.54 h73.1 r270
  text "U+" at 2153.54,2716.54 h73.1 r270
  text "U-" at 2291.34,2716.54 h73.1 r270
  text "03/2020" at 2952.76,1889.76 h64.6 r180
  text "github.com/jankae/LCR" at 2322.83,1771.65 h64.6 r180
  text "LCR Meter" at 2519.69,1653.54 h85 r180
Dimension:
  lines w0: 0,78.74 ccw(c78.74,78.74) 78.74,0 3858.27,0 ccw(c3858.27,78.74) 3937.01,78.74 3937.01,3070.87 ccw(c3858.27,3070.87) 3858.27,3149.61 78.74,3149.61 ccw(c78.74,3070.87) 0,3070.87 0,78.74
  lines w6: 0,78.74 0,3070.87
tPlace:
  lines w6: 3070.87,787.4 3149.61,787.4 3228.35,866.14 ; 3188.98,866.14 3228.35,866.14 ; 3228.35,826.77 3228.35,866.14
  text "ON/OFF" at 2755.91,807.66 h56.1
  text "Switch" at 2755.91,708.66 h56.1

## Text inside footprints (layer, text, board x,y; h text height)
DISPLAY: tPlace "2" at 157.44,2381.69 h77.5; tPlace "4" at 157.44,2281.69 h77.5; tPlace "6" at 157.44,2181.69 h77.5; tPlace "8" at 157.44,2081.69 h77.5; tPlace "10" at 147.44,1981.69 h77.5; tPlace "12" at 147.44,1881.69 h77.5; tPlace "14" at 147.44,1781.69 h77.5; tPlace "16" at 147.44,1681.69 h77.5; tPlace "18" at 147.44,1581.69 h77.5; tPlace "20" at 152.44,1481.69 h77.5; tPlace "22" at 152.44,1381.69 h77.5; tPlace "24" at 152.44,1281.69 h77.5; tPlace "26" at 152.44,1181.69 h77.5; tPlace "28" at 152.44,1081.69 h77.5; tPlace "30" at 152.44,981.69 h77.5; tPlace "32" at 152.44,881.69 h77.5; tPlace "34" at 152.44,781.69 h77.5; tPlace "36" at 152.44,681.69 h77.5; tPlace "38" at 152.44,581.69 h77.5; tPlace "40" at 152.44,481.69 h77.5